# EAGLE board mini layout_2 (EAGLE 5.11)
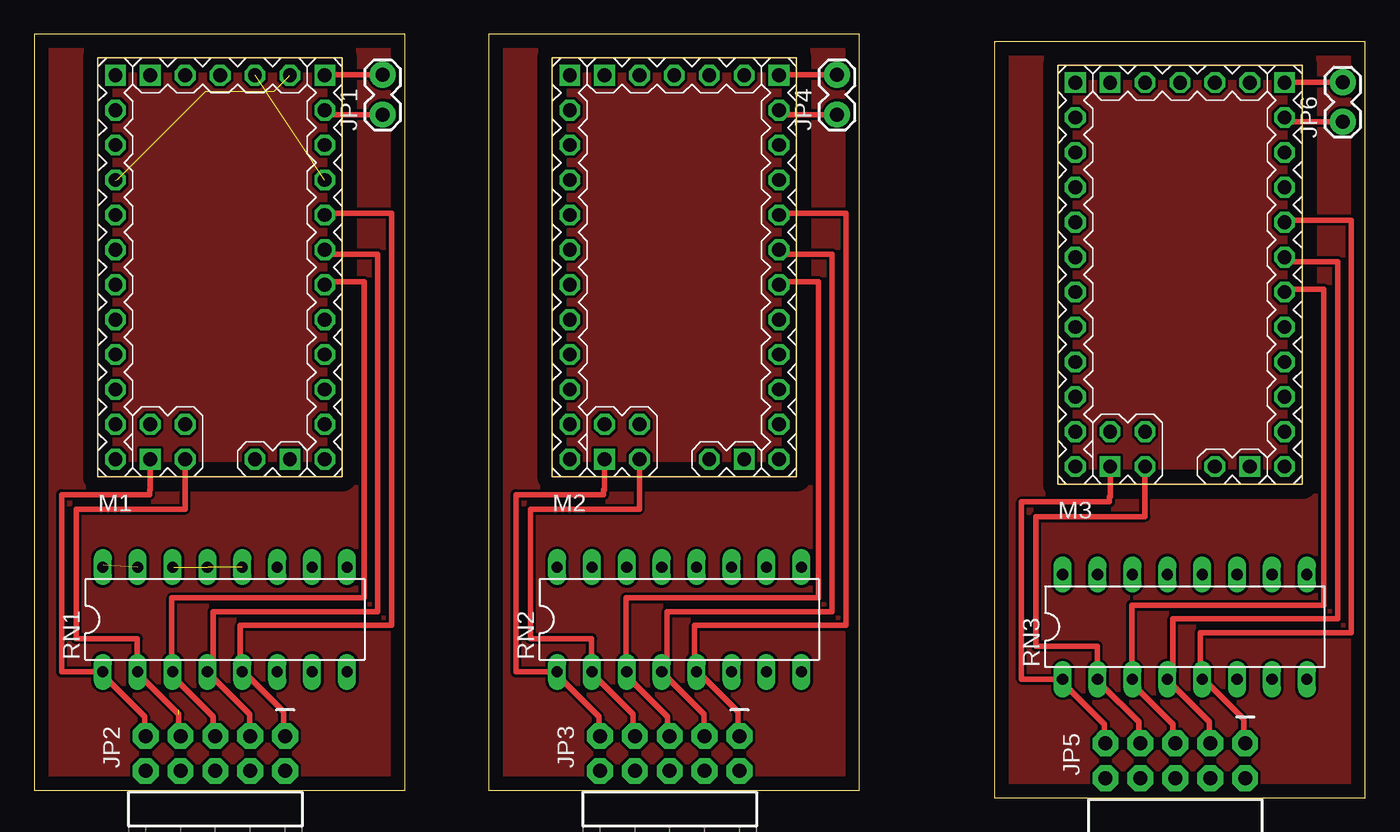
[diagram p0: board, top side]
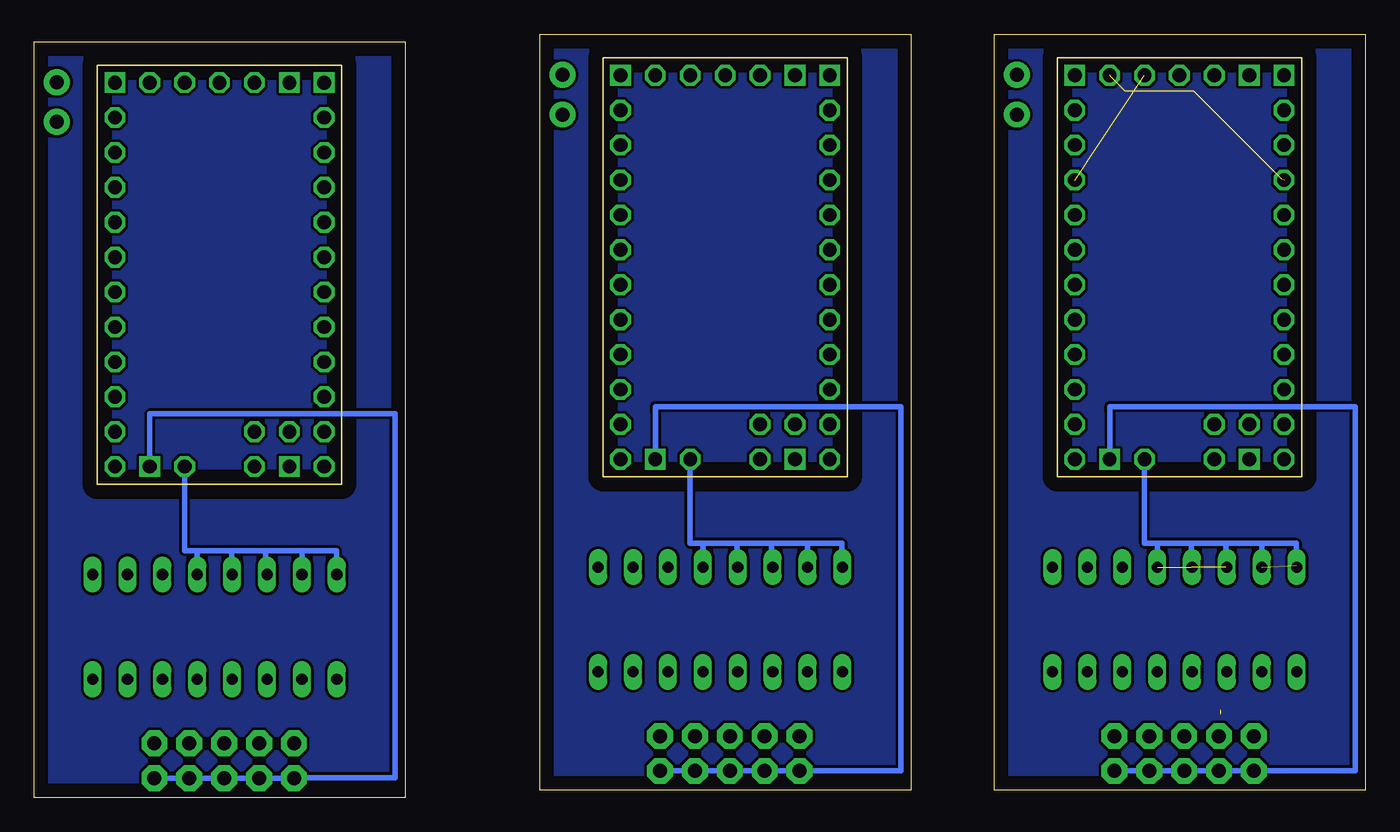
[diagram p1: board, bottom side, seen from below]

Size 96.88 x 55.53 mm. Coordinates in mm from the lower left corner, seen from the top.
Outline: 0,0.53 27,0.53 27,55.53 0,55.53 0,0.53
Outline: 33.07,0.53 60.07,0.53 60.07,55.53 33.07,55.53 33.07,0.53
Outline: 69.88,0 96.88,0 96.88,55 69.88,55 69.88,0
Copper layers (1*16): Top 0.035mm / dielectric 1.5mm / Bottom 0.035mm
Design rules "default": minimum track width 10mil, minimum drill 24mil, track to track 8mil, track to pad 8mil, pad to pad 8mil, via to via 8mil, smd to smd 8mil, copper to edge 40mil, drill to drill 8mil, minimum pad ring 10mil, minimum via ring 8mil, stop-mask expansion 4mil, vias tented up to drill 0mil, thermal gap 10mil

## Footprints (pad centres in the part's own frame; a part is rotated, then mirrored left to right if it is on the bottom)
1X02_LOCK = drill 1.016 pad 1.88 round: 1 -0.178,0; 2 2.718,0
2X5-RA = drill 1.016 pad 1.88 octagon: 1 -1.27,5.08; 2 1.27,5.08; 3 -1.27,2.54; 4 1.27,2.54; 5 -1.27,0; 6 1.27,0; 7 -1.27,-2.54; 8 1.27,-2.54; 9 -1.27,-5.08; 10 1.27,-5.08
MINI04_ALL_PINS = drill 1 octagon: +5V@1 10.16,0; +5V@2 5.08,-20.32; +5V@3 5.08,7.62; AD0 10.16,-10.16; AD1 10.16,-7.62; AD2 10.16,-5.08; AD3 10.16,-2.54; AD5 0,-20.32; AD6 -2.54,-17.78; AD7 0,-17.78; D2 -5.08,-2.54; D3 -5.08,-5.08; D4 -5.08,-7.62; D5 -5.08,-10.16; D6 -5.08,-12.7; D7 -5.08,-15.24; D8 -5.08,-17.78; D9 -5.08,-20.32; D10 10.16,-20.32; D11 10.16,-17.78; D12 10.16,-15.24; D13 10.16,-12.7; GND@1 -5.08,0; GND@2 10.16,5.08; GND@4 7.62,7.62; RESET@1 -5.08,2.54; RESET@2 10.16,2.54; RX@1 -5.08,5.08; RX@2 2.54,7.62; TX@2 0,7.62 | drill 1 square: +9V 10.16,7.62; AD4 -2.54,-20.32; GND@3 7.62,-20.32; IO7 -2.54,7.62; TX@1 -5.08,7.62
DIL16 = drill 0.813 long: 1 -8.89,-3.81; 2 -6.35,-3.81; 3 -3.81,-3.81; 4 -1.27,-3.81; 5 1.27,-3.81; 6 3.81,-3.81; 7 6.35,-3.81; 8 8.89,-3.81; 9 8.89,3.81; 10 6.35,3.81; 11 3.81,3.81; 12 1.27,3.81; 13 -1.27,3.81; 14 -3.81,3.81; 15 -6.35,3.81; 16 -8.89,3.81

## Placement (x,y rotation side)
JP1  [1X02_LOCK]  25.36,49.87 90 top
JP2  M05X2RA  [2X5-RA]  13.18,3.2 270 top
JP3  M05X2RA  [2X5-RA]  46.25,3.2 270 top
JP4  [1X02_LOCK]  58.43,49.87 90 top
JP5  M05X2RA  [2X5-RA]  83.06,2.67 270 top
JP6  [1X02_LOCK]  95.24,49.34 90 top
M1  MINI04_ALL_PINS  [MINI04_ALL_PINS]  10.98,44.93 0 top
M2  MINI04_ALL_PINS  [MINI04_ALL_PINS]  44.05,44.93 0 top
M3  MINI04_ALL_PINS  [MINI04_ALL_PINS]  80.86,44.4 0 top
RN1  [DIL16]  13.87,12.95 0 top
RN2  [DIL16]  46.94,12.95 0 top
RN3  [DIL16]  83.75,12.42 0 top

## Library data of the parts
JP1-JP6 = SparkFun
M1-M3 = arduino
RN1-RN3 = resistor-dil; OC_FARNELL: unknown; OC_NEWARK: unknown

## Nets
+5V: M1.+5V@1 M1.+5V@3
+5V1: M2.+5V@1 M2.+5V@3
+5V2: M3.+5V@1 M3.+5V@3
GND: M1.GND@1 M1.GND@4
GND1: M2.GND@1 M2.GND@4
GND2: M3.GND@1 M3.GND@4
N$1: JP1.1 M1.GND@2
N$2: JP2.2 JP2.10 M1.GND@3
N$3: JP2.9 M1.AD4 RN1.1
N$4: JP2.7 M1.AD5 RN1.2
N$6: JP2.3 M1.AD2 RN1.4
N$7: JP2.1 M1.AD3 RN1.5
N$8: JP2.5 M1.AD1 RN1.3
N$9: JP1.2 M1.+9V
N$10: M1.+5V@2 RN1.12 RN1.13 RN1.14 RN1.15 RN1.16
N$12: JP3.9 M2.AD4 RN2.1
N$13: JP3.7 M2.AD5 RN2.2
N$14: JP3.3 M2.AD2 RN2.4
N$15: JP3.1 M2.AD3 RN2.5
N$16: JP4.1 M2.GND@2
N$17: JP3.2 JP3.10 M2.GND@3
N$18: M2.+5V@2 RN2.12 RN2.13 RN2.14 RN2.15 RN2.16
N$19: JP3.5 M2.AD1 RN2.3
N$20: JP4.2 M2.+9V
N$23: JP5.9 M3.AD4 RN3.1
N$24: JP5.7 M3.AD5 RN3.2
N$25: JP5.3 M3.AD2 RN3.4
N$26: JP5.1 M3.AD3 RN3.5
N$27: JP6.1 M3.GND@2
N$28: JP5.2 JP5.10 M3.GND@3
N$29: M3.+5V@2 RN3.12 RN3.13 RN3.14 RN3.15 RN3.16
N$30: JP5.5 M3.AD1 RN3.3
N$31: JP6.2 M3.+9V

## Tracks (layer width: path | path; a pad name or v marks a point on that pad's centre or on a via)
+5V  (1 unrouted)
GND  (5 unrouted)
N$1
  Top 0.406: JP1.1 21.14,49.7 M1.GND@2
N$2
  Bottom 0.254: 8.02,1.96 JP2.10 | JP2.2 18.34,1.96
  Bottom 0.406: M1.GND@3 18.6,28.09 18.6,28.45 0.73,28.45 0.73,1.96 8.02,1.96 | JP2.10 JP2.2
N$3
  Top 0.254: RN1.1 5,9.07 | JP2.9 8.02,4.62
  Top 0.406: RN1.1 1.98,9.14 1.98,22.05 8.38,22.05 8.38,22.4 8.44,22.4 M1.AD4 | 5,9.07 5,8.89 8.02,5.87 8.02,4.55 JP2.9
N$4  (1 unrouted)
  Top 0.254: 7.67,9.07 RN1.2 | JP2.7 10.51,4.62
  Top 0.406: RN1.2 7.49,9.14 7.49,11.56 3.04,11.56 3.04,20.98 10.98,20.98 M1.AD5 | 7.67,9.07 7.85,9.07 7.85,8.71 10.51,6.05 10.51,4.6 JP2.7
N$5
  pour Top: 0,55.53 27,55.53 27,0.53 0,0.53
N$6
  Top 0.254: 12.65,9.07 RN1.4 | JP2.3 15.67,4.62
  Top 0.406: RN1.4 13,9.14 13,13.53 25,13.53 25,39.53 21.14,39.53 M1.AD2 | 12.65,9.07 15.67,6.05 15.67,4.52 JP2.3
N$7
  Top 0.254: 15.31,9.07 RN1.5 | JP2.1 18.16,4.62
  Top 0.406: RN1.5 15,9.14 15,12.53 26,12.53 26,42.53 21.14,42.53 M1.AD3 | 15.31,9.07 18.16,6.22 18.16,4.58 JP2.1
N$8
  Top 0.254: JP2.5 13.18,4.62
  Top 0.406: 21.14,37.34 M1.AD1 21.14,37.53 24,37.53 24,14.53 10,14.53 10,9.14 RN1.3 10.06,8.81 13,5.87 13,4.65 JP2.5
N$9
  Top 0.406: JP1.2 21.14,52.59 M1.+9V
N$10  (3 unrouted)
  Bottom 0.254: RN1.16 5,16.89 | 15.14,16.89 RN1.12
  Bottom 0.406: 15.14,18.49 15.49,18.49 16.06,18.49 M1.+5V@2 | RN1.15 7.52,18.49 | RN1.14 10.16,16.76 10.16,18.49 | RN1.13 12.65,16.76 12.65,18.49 | 15.14,18.49 15.14,16.89 | 5,16.89 5,18.49 15.14,18.49
N$11
  pour Bottom: 0,55.53 27,55.53 27,0.53 0,0.53
N$12
  Top 0.254: RN2.1 38.07,9.07 | JP3.9 41.09,4.62
  Top 0.406: RN2.1 35.05,9.14 35.05,22.05 41.45,22.05 41.45,22.4 41.51,22.4 M2.AD4 | 38.07,9.07 38.07,8.89 41.09,5.87 41.09,4.55 JP3.9
N$13
  Top 0.254: 40.74,9.07 RN2.2 | JP3.7 43.58,4.62
  Top 0.406: RN2.2 40.56,9.14 40.56,11.56 36.12,11.56 36.12,20.98 44.05,20.98 M2.AD5 | 40.74,9.07 40.92,9.07 40.92,8.71 43.58,6.05 43.58,4.6 JP3.7
N$14
  Top 0.254: 45.72,9.07 RN2.4 | JP3.3 48.74,4.62
  Top 0.406: RN2.4 46.07,9.14 46.07,13.53 58.07,13.53 58.07,39.53 54.21,39.53 M2.AD2 | 45.72,9.07 48.74,6.05 48.74,4.52 JP3.3
N$15
  Top 0.254: 48.38,9.07 RN2.5 | JP3.1 51.23,4.62
  Top 0.406: RN2.5 48.07,9.14 48.07,12.53 59.07,12.53 59.07,42.53 54.21,42.53 M2.AD3 | 48.38,9.07 51.23,6.22 51.23,4.58 JP3.1
N$16
  Top 0.406: JP4.1 54.21,49.7 M2.GND@2
N$17
  Bottom 0.254: 41.09,1.96 JP3.10 | JP3.2 51.41,1.96
  Bottom 0.406: M2.GND@3 51.67,28.09 51.67,28.45 33.8,28.45 33.8,1.96 41.09,1.96 | JP3.10 JP3.2
N$18
  Bottom 0.254: RN2.16 38.07,16.89 | 48.21,16.89 RN2.12
  Bottom 0.406: 48.21,18.49 48.56,18.49 49.13,18.49 M2.+5V@2 | RN2.15 40.59,18.49 | RN2.14 43.23,16.76 43.23,18.49 | RN2.13 45.72,16.76 45.72,18.49 | 48.21,18.49 48.21,16.89 | 38.07,16.89 38.07,18.49 48.21,18.49
N$19
  Top 0.254: JP3.5 46.25,4.62
  Top 0.406: 54.21,37.34 M2.AD1 54.21,37.53 57.07,37.53 57.07,14.53 43.07,14.53 43.07,9.14 RN2.3 43.13,8.81 46.07,5.87 46.07,4.65 JP3.5
N$20
  Top 0.406: JP4.2 54.21,52.59 M2.+9V
N$21
  pour Top: 33.07,55.53 60.07,55.53 60.07,0.53 33.07,0.53
N$22
  pour Bottom: 33.07,55.53 60.07,55.53 60.07,0.53 33.07,0.53
N$23
  Top 0.254: RN3.1 74.88,8.53 | JP5.9 77.9,4.09
  Top 0.406: RN3.1 71.85,8.61 71.85,21.51 78.25,21.51 78.25,21.87 78.31,21.87 M3.AD4 | 74.88,8.53 74.88,8.36 77.9,5.33 77.9,4.02 JP5.9
N$24
  Top 0.254: 77.54,8.53 RN3.2 | JP5.7 80.39,4.09
  Top 0.406: RN3.2 77.37,8.61 77.37,11.02 72.92,11.02 72.92,20.45 80.86,20.45 M3.AD5 | 77.54,8.53 77.72,8.53 77.72,8.18 80.39,5.51 80.39,4.07 JP5.7
N$25
  Top 0.254: 82.52,8.53 RN3.4 | JP5.3 85.54,4.09
  Top 0.406: RN3.4 82.88,8.61 82.88,13 94.88,13 94.88,39 91.02,39 M3.AD2 | 82.52,8.53 85.54,5.51 85.54,3.99 JP5.3
N$26
  Top 0.254: 85.19,8.53 RN3.5 | JP5.1 88.03,4.09
  Top 0.406: RN3.5 84.88,8.61 84.88,12 95.88,12 95.88,42 91.02,42 M3.AD3 | 85.19,8.53 88.03,5.69 88.03,4.04 JP5.1
N$27
  Top 0.406: JP6.1 91.02,49.16 M3.GND@2
N$28
  Bottom 0.254: 77.9,1.42 JP5.10 | JP5.2 88.21,1.42
  Bottom 0.406: M3.GND@3 88.47,27.56 88.47,27.91 70.61,27.91 70.61,1.42 77.9,1.42 | JP5.10 JP5.2
N$29
  Bottom 0.254: RN3.16 74.88,16.36 | 85.01,16.36 RN3.12
  Bottom 0.406: 85.01,17.96 85.37,17.96 85.94,17.96 M3.+5V@2 | RN3.15 77.39,17.96 | RN3.14 80.03,16.23 80.03,17.96 | RN3.13 82.52,16.23 82.52,17.96 | 85.01,17.96 85.01,16.36 | 74.88,16.36 74.88,17.96 85.01,17.96
N$30
  Top 0.254: JP5.5 83.06,4.09
  Top 0.406: 91.02,36.8 M3.AD1 91.02,37 93.88,37 93.88,14 79.88,14 79.88,8.61 RN3.3 79.94,8.28 82.88,5.33 82.88,4.12 JP5.5
N$31
  Top 0.406: JP6.2 91.02,52.06 M3.+9V
N$32
  pour Top: 69.88,55 96.88,55 96.88,0 69.88,0
N$33
  pour Bottom: 69.88,55 96.88,55 96.88,0 69.88,0